# Altium PCB PCB_BSPD.PcbDoc
Units mil, origin at the board's own origin, x right, y up, seen from the top; angles counter-clockwise.
Board outline 3020.03 x 1855.02 mil, 2 copper layers (Top Layer, Bottom Layer); 11 components, 0 nets, 44 pads, 0 vias.
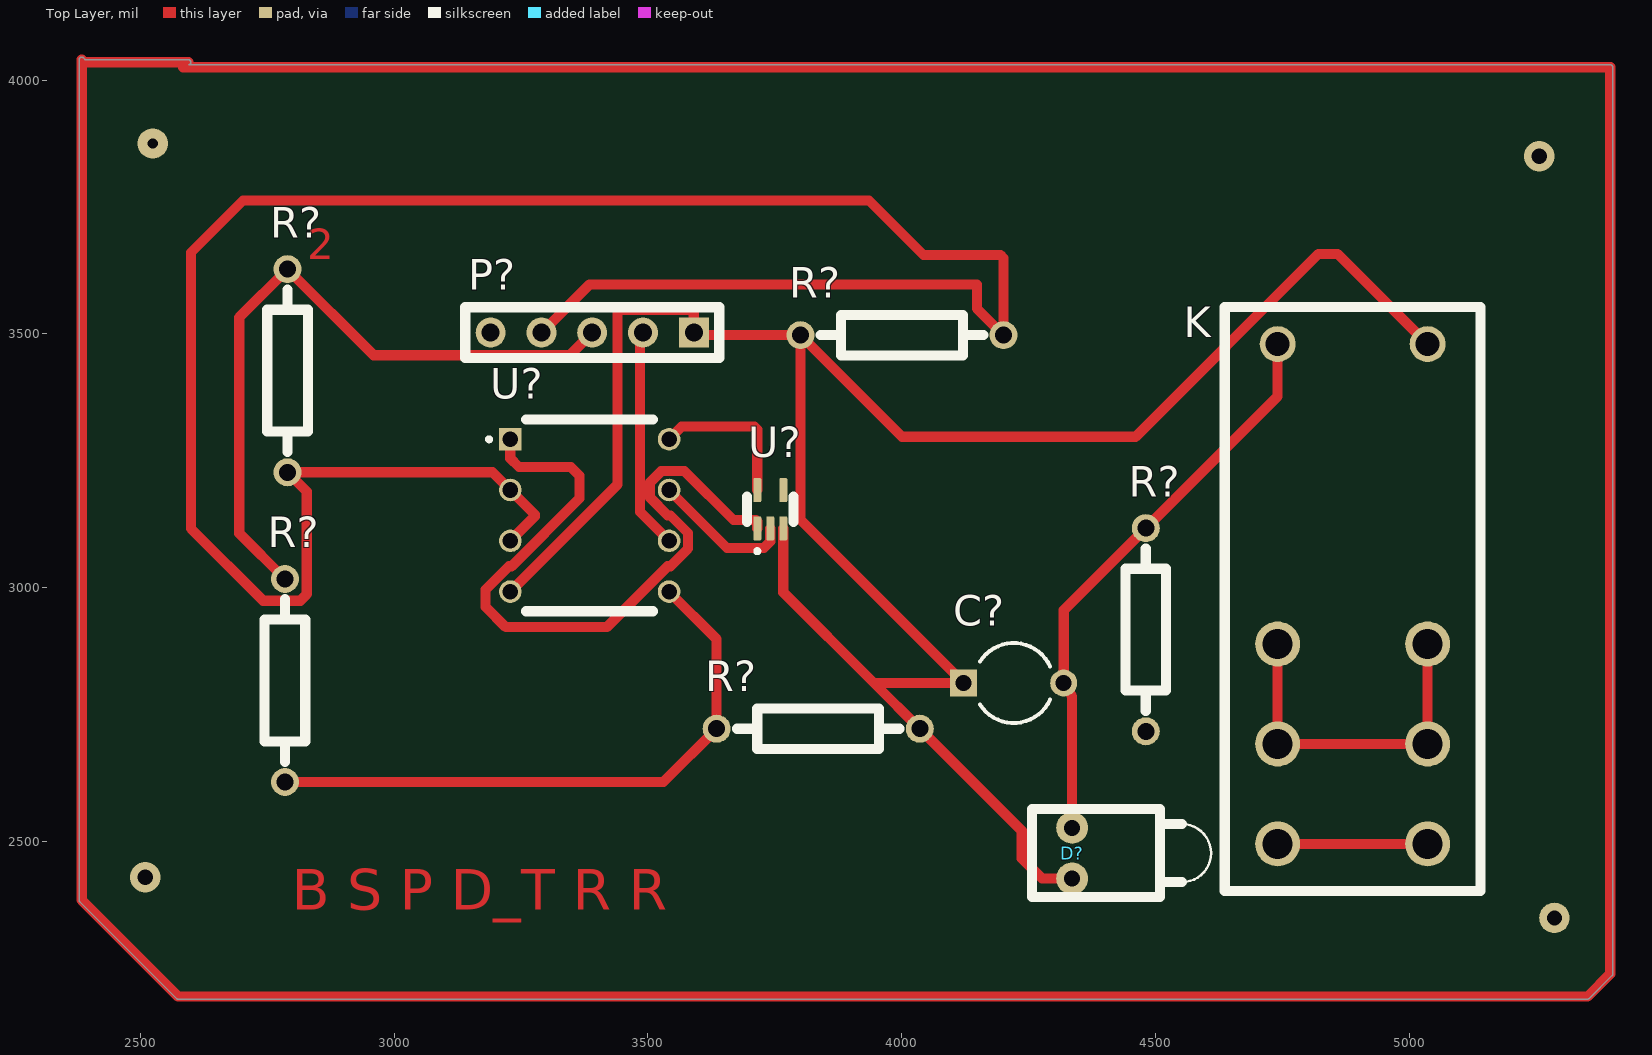
[diagram p0: Top Layer view]
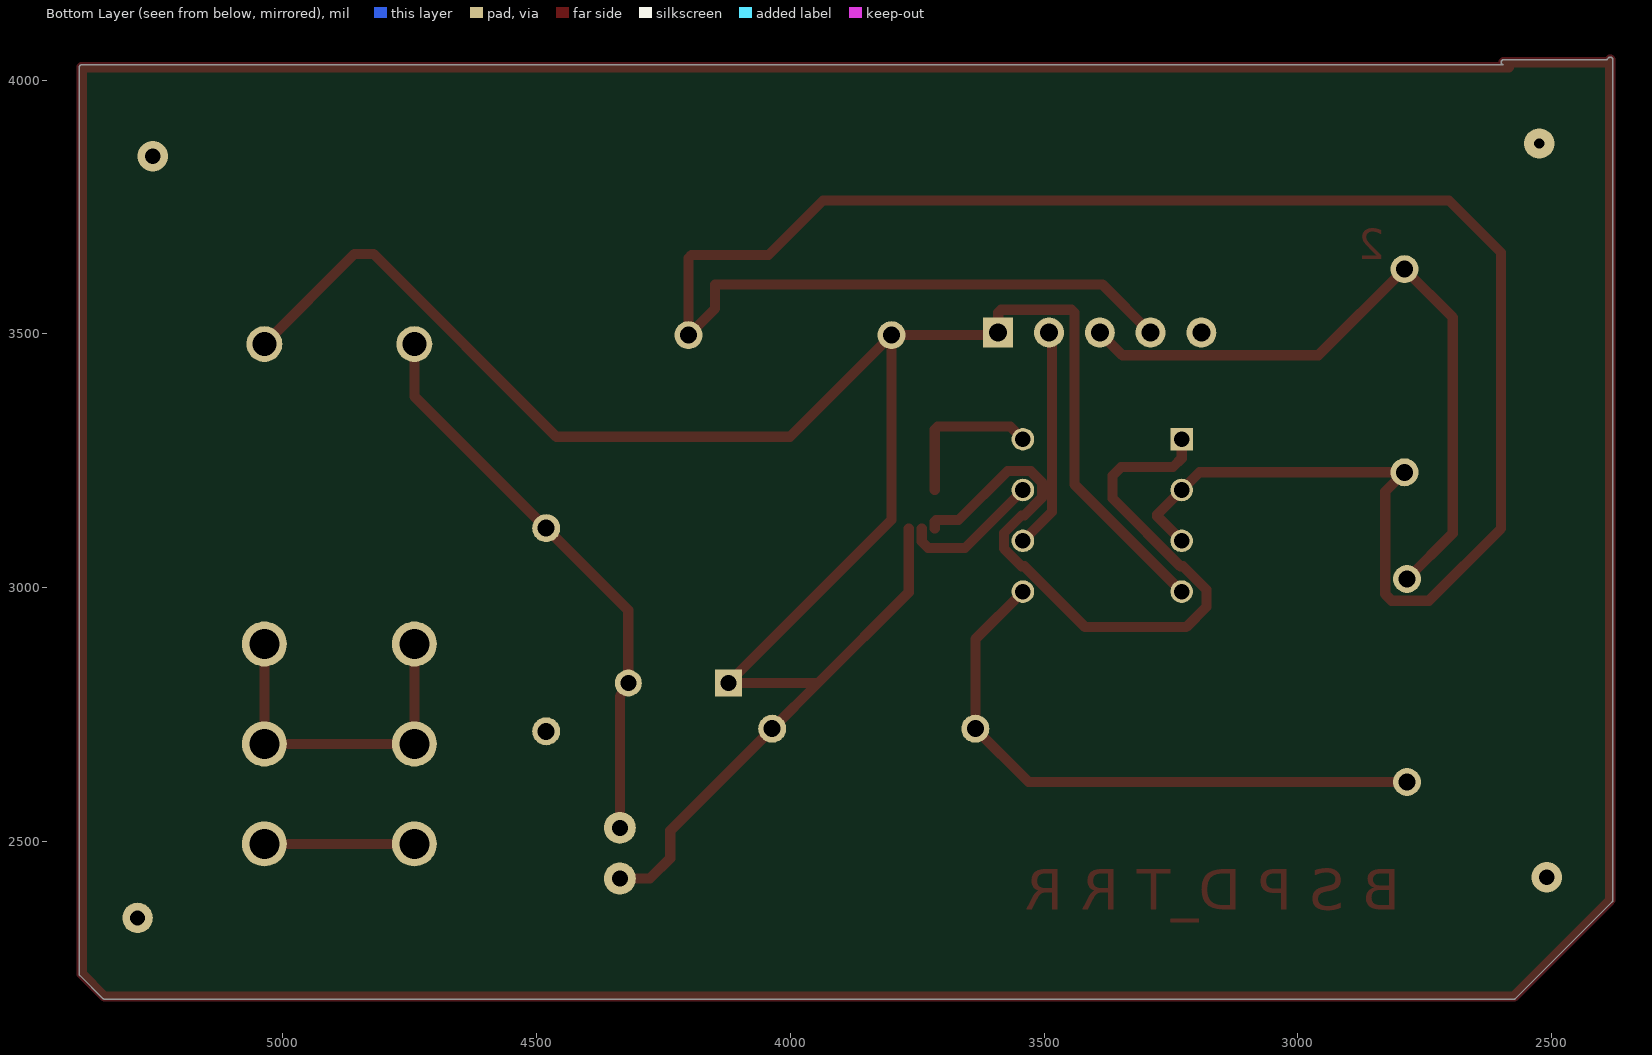
[diagram p1: Bottom Layer view, seen from below]

## Layer stack, top to bottom
Top Solder: solder mask 0.4, Solder Resist, Dk 3.5
Top Layer: signal copper 1.4
Dielectric 1: dielectric 12.6, FR-4, Dk 4.8
Bottom Layer: signal copper 1.4
Bottom Solder: solder mask 0.4, Solder Resist, Dk 3.5

## Board outline
2381.45,2381.45 2571.45,2191.45 2571.44,2191.47 ccw(c2575,2195) 2575,2189.99 5350,2189.99 ccw(c5350,2195) 5353.56,2191.47 5353.55,2191.45 5398.55,2236.45 5398.53,2236.44 ccw(c5395,2240) 5400.02,2240 5400.02,4025 ccw(c5395,4025) 5395,4030.01 2595.55,4030.01 ccw(c2595,4035) 2600.01,4035 ccw(c2595,4035) 2595,4040.01 2392.08,4040.01 2388.55,4043.55 2388.56,4043.53 ccw(c2385,4040) 2379.99,4040 2379.99,2385 ccw(c2385,2385)

## Design rules (kind name [scope] priority, off if disabled: settings)
Clearance [All] p1: gap=10 ignorepadtopadclearanceinfootprint=FALSE except(0: Arc-Hole Track-Hole SMDPad-Hole THPad-Hole Via-Hole Fill-Hole Poly-Hole Region-Hole Text-Hole)
PolygonConnect [All] p1: connectstyle=Relief reliefconductorwidth=10 reliefentries=4 polygonreliefangle="90 Angle" airgapwidth=10
RoutingVias [All] p1: holewidth=28 width=50 viastyle="Through Hole" minholewidth=28 minwidth=50 maxholewidth=28 maxwidth=50
SolderMaskExpansion [All] p1: expansion=4 istentingtop=FALSE
Width [All] p1: maxlimit=10 minlimit=10 preferedwidth=10
30 further rules are at their usual default settings.

## Components (designator, comment, footprint, x,y, rotation, side; value= is the part's Value field where it differs from the comment)
C? "Cap2" CAPR5-4X5 4220.28,2812.6 r0 top value=100uF
D? "LED1" LED-1 4335.28,2477.6 r0 top
K "2-1440002-8" RELAY_2-1440002-8 4887.64,2978.03 r90 top
P? "Header 5" HDR1X5 3590.28,3502.6 r180 top
R? "Res2" AXIAL-0.4 4000.28,3497.6 r0 top value=1K
R? "Res2" AXIAL-0.4 2790.28,3427.6 r90 top value=1K
R? "Res2" AXIAL-0.4 4480.28,2917.6 r90 top value=5.1K
R? "Res2" AXIAL-0.4 2785.28,2817.6 r90 top value=1K
R? "Res2" AXIAL-0.4 3835.28,2722.6 r180 top value=1K
U? "LM2903P" DIP794W45P254L959H508Q8 3385.28,3142.6 r0 top
U? "SN74LVC1G08DCKR" SOT65P210X110-5N 3740.87,3154.8 r90 top

## Footprints (in the part's own frame and the unit in brackets; to place one, negate y for a bottom-side part, rotate by r counter-clockwise, add the part's x,y. Pads: shape width x height; smd on the part's side, far side on the other; paste and mask are expansions set on the pad)
AXIAL-0.4 [mm] "Axial Device, Thru-Hole; 2 Leads; 0.4 in Pin Spacing"
  round 1.4 hole 0.85: 1(-5.08,0) 2(5.08,0)
  silkscreen extent -4.06,-1.02 4.06,1.02
CAPR5-4X5 [mm] "Capacitor; 2 Leads"
  rect 1.35x1.35 hole 0.8: 1(-2.5,0)
  round 1.35 hole 0.8: 2(2.5,0)
  silkscreen extent -1.69,-2 1.82,2
DIP794W45P254L959H508Q8 [mm]
  rect 1.13x1.13 hole 0.78: 1(-3.97,3.81)
  round 1.13 hole 0.78: 2(-3.97,1.27) 3(-3.97,-1.27) 4(-3.97,-3.81) 5(3.97,-3.81) 6(3.97,-1.27) 7(3.97,1.27) 8(3.97,3.81)
  silkscreen extent -5.13,-4.8 3.17,4.8, body extent -3.94,-4.79 3.94,4.79, height 5.08
HDR1X5 [mm] "Connector; Header; 5 Position"
  rect 1.5x1.5 hole 0.9: 1(0,0)
  round 1.5 hole 0.9: 2(2.54,0) 3(5.08,0) 4(7.62,0) 5(10.16,0)
  silkscreen extent -1.27,-1.27 11.43,1.27
LED-1 [mm] "LED; 2 Leads"
  round 1.6 hole 0.8: 1(0,1.27) 2(0,-1.27)
  silkscreen extent -2,-2.2 6.95,2.2
RELAY_2-1440002-8 [mm]
  round 1.8 hole 1.2: A1(12.75,3.75) A2(12.75,-3.75)
  round 2.25 hole 1.5: COM_1(-7.25,3.75) COM_2(-7.25,-3.75) NC_1(-2.25,3.75) NC_2(-2.25,-3.75) NO_1(-12.25,3.75) NO_2(-12.25,-3.75)
  silkscreen extent -14.6,-6.4 14.6,6.4
SOT65P210X110-5N [mm]
  rrect25% 1.19x0.4 smd: 1(-0.96,0.65) 2(-0.96,0) 3(-0.96,-0.65) 4(0.96,-0.65) 5(0.96,0.65)
  silkscreen extent -2.2,-1.17 0.63,1.17, body extent -1.05,-1 1.05,1, height 1.1

## Part data
C?: "Capacitor", PackageDescription="Capacitor; 2 Leads", PackageReference=CAPR5-4X5, Published=23-Sep-2002, Publisher="Altium Limited"
D?: "Typical RED GaAs LED", LatestRevisionDate=08-Jul-2005, LatestRevisionNote="Mech Layer 1 removed.", PackageDescription="LED; 2 Leads", PackageReference=LED-1, Published=8-Jun-2000, Publisher="Altium Limited"
K: "General Purpose Relay, OZ Series, Power, Non Latching, SPDT, 24 VDC, 16 A", Package=None, Availability=Unavailable, MF="TE Connectivity", MP=2-1440002-8, Price=None, SnapEDA_Link=https://www.snapeda.com/parts/2-1440002-8/TE%20Connectivity%20Potter%20&%20Brumfield%20Relays/view-part/2622155/?ref=snap
P?: "Header, 5-Pin", LatestRevisionDate=17-Jul-2002, LatestRevisionNote="Re-released for DXP Platform.", Publisher="Altium Limited"
R? R? R? R? R?: "Resistor", LatestRevisionDate=17-Jul-2002, LatestRevisionNote="Re-released for DXP Platform.", PackageDescription="Axial Device, Thru-Hole; 2 Leads; 0.4 in Pin Spacing", PackageReference=AXIAL-0.4, Published=8-Jun-2000, Publisher="Altium Limited"
U?: "Dual differential comparator, automotive grade 8-PDIP -40 to 125", Package="PDIP-8 Texas", Availability=Warning, Check_prices=https://www.snapeda.com/parts/LM2903P/Texas%20Instruments/view-part/503784/?ref=eda, MF="Texas Instruments", MP=LM2903P, Price=None, Purchase-URL=https://pricing.snapeda.com/search/part/LM2903P/?ref=eda, SnapEDA_Link=https://www.snapeda.com/parts/LM2903P/Texas%20Instruments/view-part/503784/?ref=snap
U?: "Single 2-Input Positive-AND Gate 5-SC70 -40 to 125", Package="SOT-SC70-5 Texas Instruments", Availability=Good, Check_prices=https://www.snapeda.com/parts/SN74LVC1G08DCKR/Texas%20Instruments/view-part/78672/?ref=eda, MF="Texas Instruments", MP=SN74LVC1G08DCKR, Price=None, Purchase-URL=https://pricing.snapeda.com/search/part/SN74LVC1G08DCKR/?ref=eda, SnapEDA_Link=https://www.snapeda.com/parts/SN74LVC1G08DCKR/Texas%20Instruments/view-part/78672/?ref=snap

## Free pads (board coordinates)
  round 60 hole 20: 1(2525,3875)
  round 60 hole 30: 2(2510,2430) 3(5285,2350) 4(5255,3850)

## Nets (pads, with @x,y where several pads share a name; then routed paths per layer and width w, separated by ;. In a path a pad name is that pad's centre, name@x,y a point inside that pad or via, vN(x,y) a via of type N, cw(c..) or ccw(c..) an arc to the next point about the centre after c; other vN are vias at no path point)
pads on no net: C?.1 C?.2 D?.1 D?.2 K.A1 K.A2 K.COM_1 K.COM_2 K.NC_1 K.NC_2 K.NO_1 K.NO_2 P?.1 P?.2 P?.3 P?.4 P?.5 R?.1 R?.2 U?.1 U?.2 U?.3 U?.4 U?.5 U?.6 U?.7 U?.8
copper on no net: | length 25809
  Top Layer w20: 2585,4025 5395,4025 5395,2240 5350,2195 2575,2195 2385,2385 2385,4040 2390,4035 2595,4035 ; 2785.28,2617.6 3530.28,2617.6 3635.28,2722.6 3635.28,2898.9 3541.58,2992.6 ; 2785.28,3017.6 2695.28,3107.6 2695.28,3532.6 2790.28,3627.6 2959.8,3458.07 3345.75,3458.07 3390.28,3502.6 ; 3228.98,2992.6 3440.28,3203.9 3440.28,3541.74 3446.13,3547.6 3584.42,3547.6 3590.28,3541.74 3590.28,3502.6 3595.28,3497.6 3800.28,3497.6 ; 3228.98,3092.6 3277.28,3140.9 3277.28,3144.3 3228.98,3192.6 3193.98,3227.6 2790.28,3227.6 2828.28,3189.6 2828.28,2987.6 2815.28,2974.6 2742.28,2974.6 2600.28,3116.6 2600.28,3660.27 2702.6,3762.6 3935.28,3762.6 4042.6,3655.27 4194.42,3655.27 4200.28,3649.41 4200.28,3497.6 4147.78,3550.1 4147.78,3597.6 3385.28,3597.6 3290.28,3502.6 ; 3228.98,3292.6 3228.98,3255.35 3246.21,3238.12 3348.04,3238.12 3365.28,3220.88 3365.28,3176.23 3231.65,3042.6 3226.3,3042.6 3180.28,2996.57 3180.28,2962.6 3220.28,2922.6 3418.9,2922.6 3538.9,3042.6 3544.25,3042.6 3578.82,3077.17 3578.82,3108.03 3544.25,3142.6 3538.91,3142.6 3504.33,3177.17 3504.33,3208.03 3526.15,3229.84 3572.07,3229.84 3668.45,3133.46 3712.4,3133.46 3715.28,3130.59 3715.28,3117.01 ; 3490.28,3502.6 3484.33,3496.65 3484.33,3149.84 3541.58,3092.6 ; 3541.58,3192.6 3655.59,3078.58 3728.21,3078.58 3740.87,3091.24 3740.87,3117.01 ; 3541.58,3292.6 3566.58,3317.6 3709.42,3317.6 3715.28,3311.74 3715.28,3192.6 ; 3766.46,3117.01 3766.46,2991.42 3945.28,2812.6 ; 4335.28,2427.6 4276.13,2427.6 4236.13,2467.6 4236.13,2521.74 4035.28,2722.6 3945.28,2812.6 ; 4335.28,2527.6 4335.28,2786.02 4318.7,2812.6 4318.7,2956.02 4480.28,3117.6 4740,3377.32 4740,3480 ; 4740,2495.75 5035.28,2495.75 ; 4740,2889.45 4740,2692.6 5035.28,2692.6 5035.28,2889.45 ; 5035.28,3480 4857.68,3657.6 4820.28,3657.6 4460.28,3297.6 4000.28,3297.6 3800.28,3497.6 ; 3800.28,3497.6 3800.28,3134.17 4121.85,2812.6 3945.28,2812.6

## Other copper
Top Layer:
  text "2" at 2828.71,3627.05 h103.23
  text "B S P D_T R R" at 2798.5,2366.33 h80